# Altium PCB PCB_V12.PcbDoc
Units mm, origin at the board's own origin, x right, y up, seen from the top; angles counter-clockwise.
Board outline 65 x 56 mm, 2 copper layers (Top Layer, Bottom Layer); 64 components, 46 nets, 286 pads, 184 vias.
Unrouted connection lines stored in the file: 18.
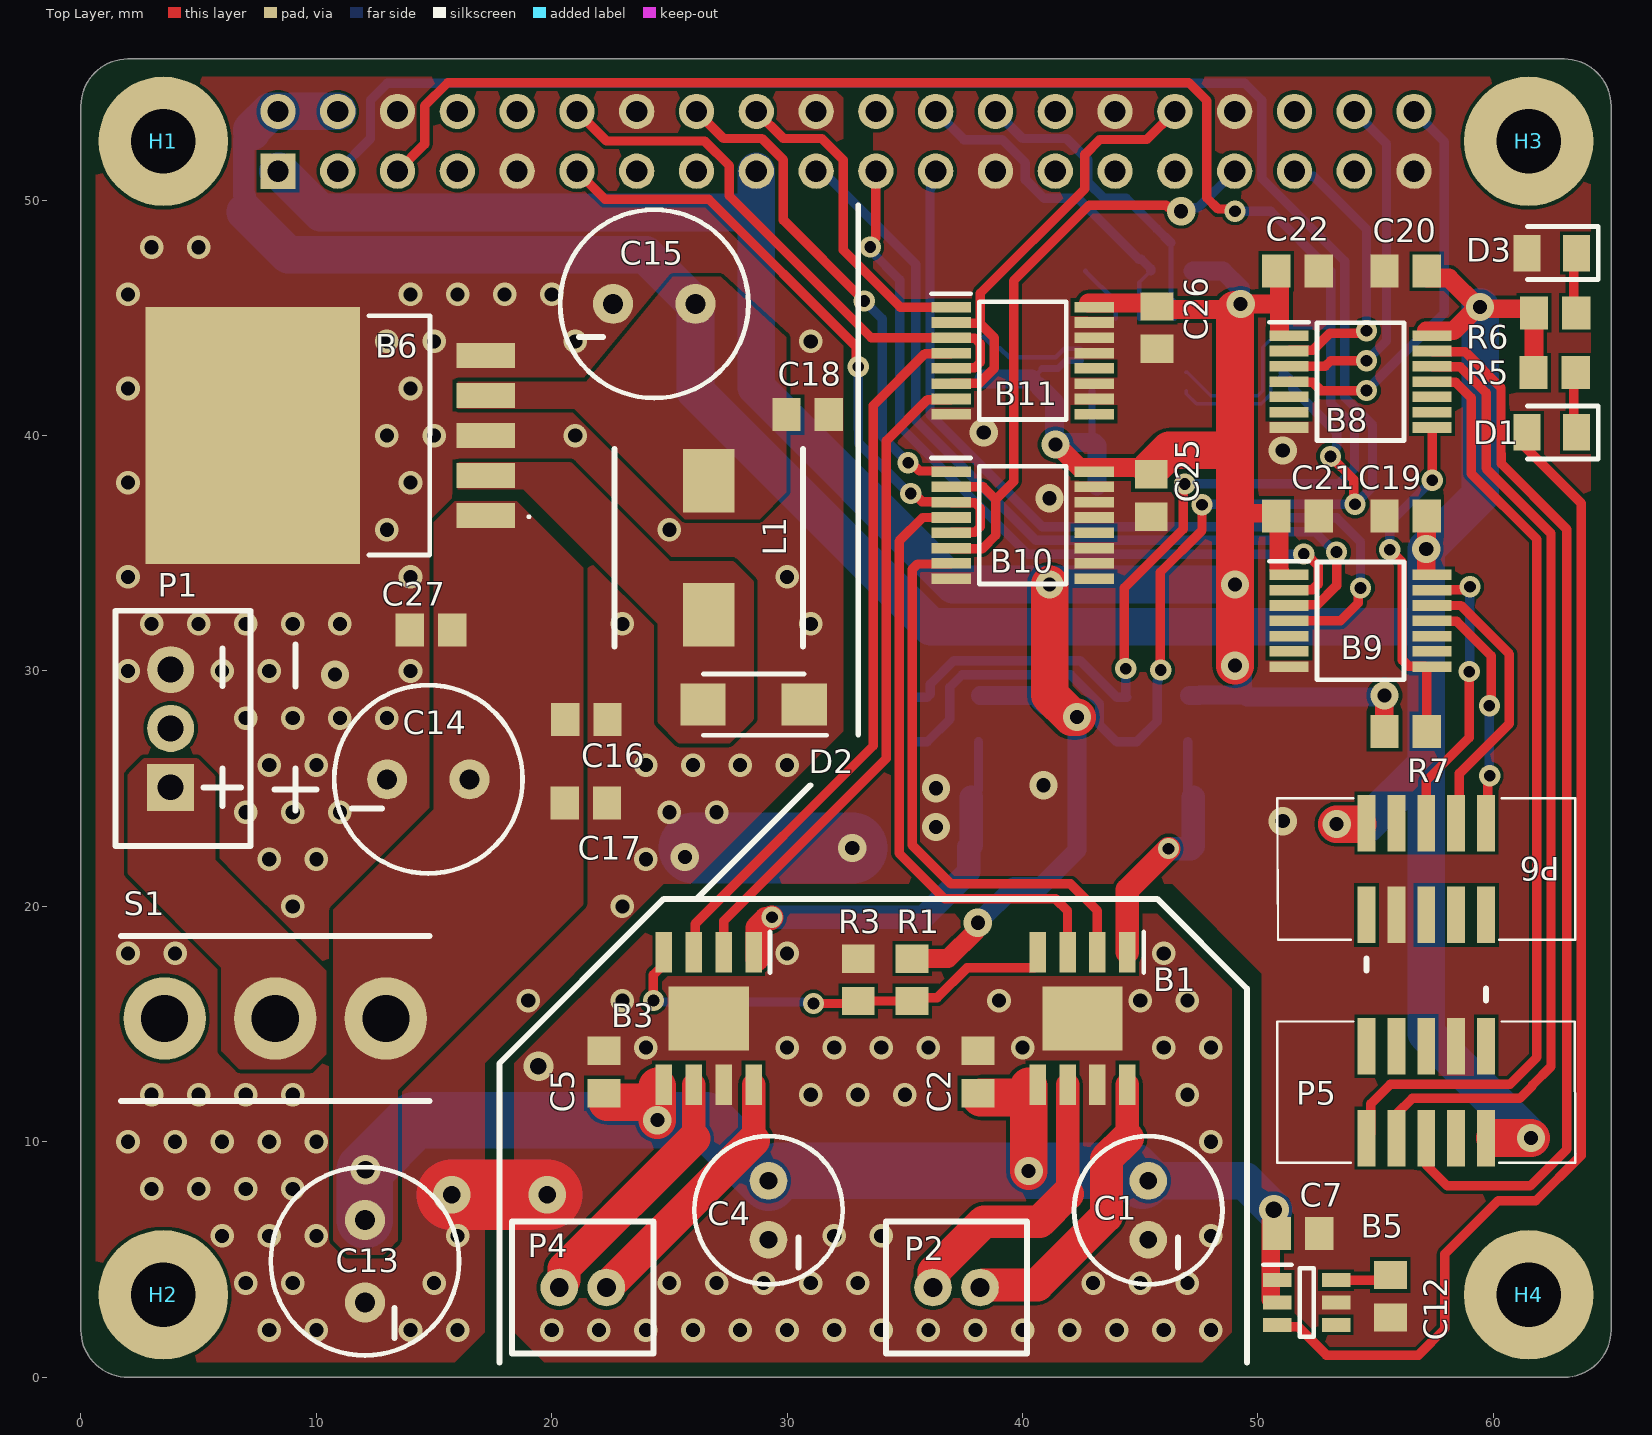
[diagram p0: Top Layer view]
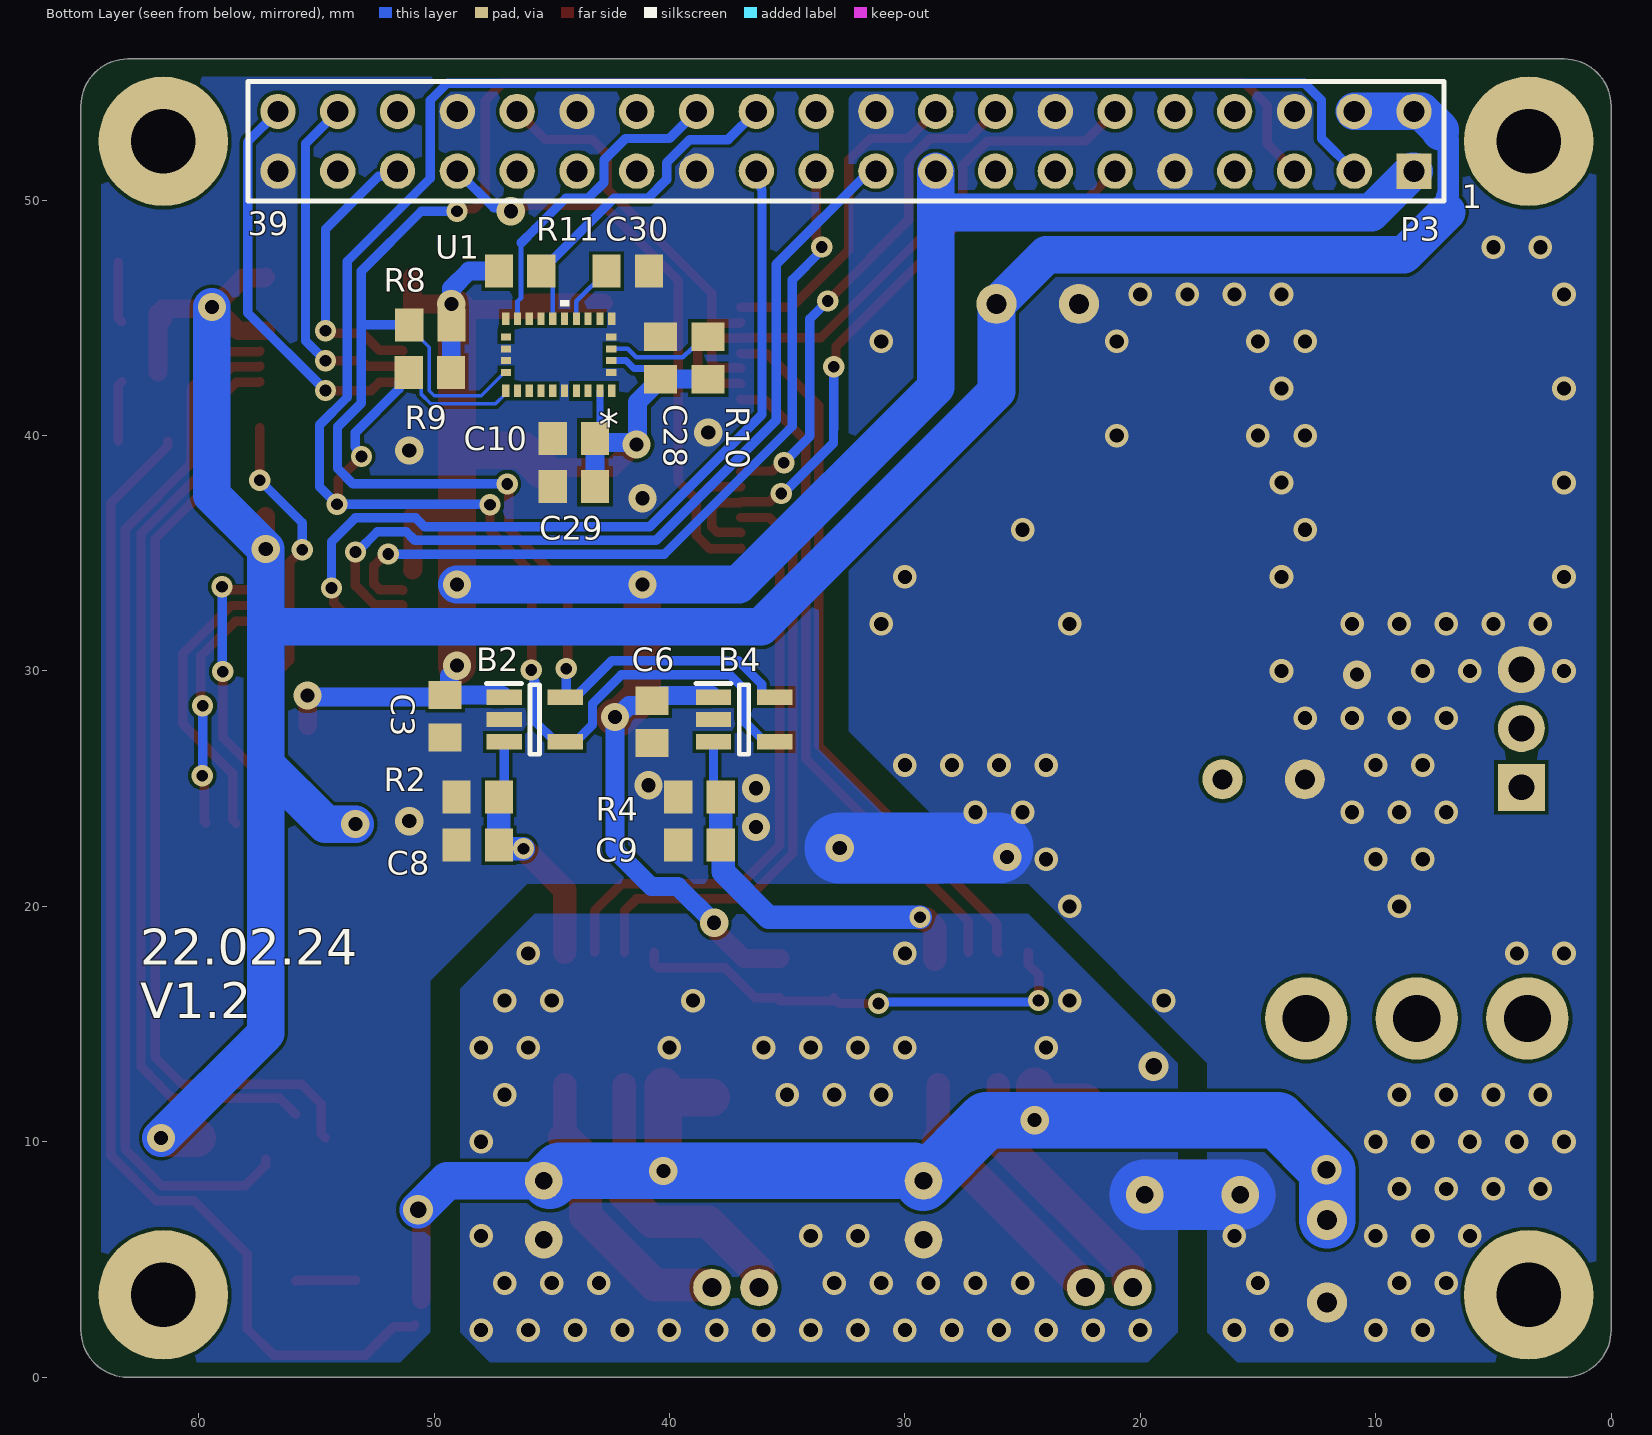
[diagram p1: Bottom Layer view, seen from below]

## Layer stack, top to bottom
Top Solder: solder mask 0.0102, Solder Resist, Dk 3.5
Top Layer: signal copper 0.0356
Dielectric 1: dielectric 0.32, FR-4, Dk 4.8
Bottom Layer: signal copper 0.0356
Bottom Solder: solder mask 0.0102, Solder Resist, Dk 3.5

## Board outline
2,0 cw(c2,2) 0,2 0,54 cw(c2,54) 2,56 63,56 cw(c63,54) 65,54 65,2 cw(c63,2) 63,0

## Design rules (kind name [scope] priority, off if disabled: settings)
BoardOutlineClearance [All] p1: gap=0.254 ignorepadtopadclearanceinfootprint=FALSE except(0: Arc-SplitContinuation Track-SplitContinuation SMDPad-SplitContinuation THPad-SplitContinuation Via-SplitContinuation Fill-SplitContinuation Poly-SplitContinuation Region-SplitContinuation Text-SplitContinuation)
Clearance [All] p1: gap=0.15 ignorepadtopadclearanceinfootprint=FALSE
HoleSize [All] p1: absolutevalues=TRUE maxlimit=3 minlimit=0.45 maxpercent=80.000 minpercent=20.000
PlaneClearance [All] p1: clearance=0.5
PlaneConnect [All] p1: planeconnectstyle=Relief reliefexpansion=0.5 reliefentries=4 reliefconductorwidth=0.3 reliefairgap=0.3
PolygonConnect [All] p1: connectstyle=Direct reliefconductorwidth=0.8 reliefentries=4 polygonreliefangle="90 Angle" airgapwidth=0.2
RoutingVias RoutingVias_1 [(InNet('3V3') OR InNet('5V') OR InNet('Vbat') OR InNet('GND'))] p1: holewidth=0.6 width=1.2 viastyle="Through Hole" minholewidth=0.6 minwidth=1 maxholewidth=0.8 maxwidth=1.6
RoutingVias [All] p2: holewidth=0.5 width=0.9 viastyle="Through Hole" minholewidth=0.5 minwidth=0.9 maxholewidth=0.8 maxwidth=1.6
SMDNeckDown [All] p1: percent=400.000
SilkToSilkClearance [All] p1: silktosilkclearance=0.15
SilkToSolderMaskClearance [IsPad] p1: minsilkscreentomaskgap=0.15 clearancetoexposedcopper=TRUE
SolderMaskExpansion [All] p1: expansion=0.1 istentingtop=FALSE
UnRoutedNet [All] p1: checkbadconnections=TRUE
Width Width_1 [(InNet('3V3') OR InNet('5V') OR InNet('Vbat') OR InNet('GND') OR InNet(NetB3_8) OR InNet('NetB3_6') OR InNet('NetB1_6') OR InNet('NetB1_8'))] p1: maxlimit=3 minlimit=0.2 preferedwidth=0.8 minimp=50.000000 maximp=50.000000 favimp=50.000000
Width [All] p2: maxlimit=1 minlimit=0.15 preferedwidth=0.4
24 further rules are at their usual default settings.

## Classes and differential pairs
component class U_newIMU: C10 C28 C29 C30 R10 R11 U1
component class U_Multiplexer: B10 B11 C25 C26
component class U_PowerSupply: B5 B6 C7 C12 C13 C14 C15 C16 C17 C18 C27 D1 D2 D3 L1 R5 R6
component class U_MotorDrivers: B1 B2 B3 B4 C1 C2 C3 C4 C5 C6 C8 C9 R1 R2 R3 R4
component class U_Encoder: B8 B9 C19 C20 C21 C22 R7
component class Schema: H1 H2 H3 H4 P1 P2 P3 P4 P5 P6 R8 R9 S1

## Components (designator, comment, footprint, x,y, rotation, side; value= is the part's Value field where it differs from the comment)
B1 "DRV8231ADDAR" SOIC127P600X170-9M 42.545,15.24 r270 top locked
B2 "MCP3021A3T-E_OT" SOT95P280X145-5M 45.72,27.94 r180 bottom locked
B3 "DRV8231ADDAR" SOIC127P600X170-9M 26.67,15.24 r270 top locked
B4 "MCP3021A3T-E_OT" SOT95P280X145-5M 36.83,27.94 r180 bottom locked
B5 "S-1011A70-M6T1U4" SOT95P275X135-6N 52.07,3.175 r0 top locked
B6 "AP1501-50K5G-13" AP150150K5G13 11.43,40.005 r90 top locked
B8 "LSF0204PW-Q100J" SOP65P640X110-14M 54.356,42.291 r0 top locked
B9 "LSF0204PW-Q100J" SOP65P640X110-14M 54.356,32.131 r0 top locked
B10 "74LCX157FT" SOP65P640X120-16M 40.005,36.195 r0 top locked
B11 "74LCX157FT" SOP65P640X120-16M 40.005,43.18 r0 top locked
C1 "Cap Pol2" CAP68uF 45.339,8.342 r270 top value=68uF
C2 "Cap" 0805_Lorin 38.1,12.065 r90 top locked value=100nF
C3 "Cap" 0805_Lorin 49.53,27.178 r90 bottom value=100nF
C4 "Cap Pol2" CAP68uF 29.21,8.342 r270 top value=68uF
C5 "Cap" 0805_Lorin 22.225,12.065 r90 top locked value=100nF
C6 "Cap" 0805_Lorin 40.74,26.94 r90 bottom value=100nF
C7 "Cap" 0805_Lorin 52.6,6.096 r180 top value=100nF
C8 "Cap" 0805_Lorin 49.044,22.606 r180 bottom value=~2.2uF
C9 "Cap" 0805_Lorin 39.624,22.606 r180 bottom value=~2.2uF
C10 "Cap" 0805_Lorin 44.958,39.878 r180 bottom value=100nF
C12 "Cap" 0805_Lorin 55.626,2.54 r90 top value="40 - 80 nF"
C13 "Cap Pol2" CAP390uF 12.065,6.675 r270 top value=~390uF
C14 "Cap Pol2" CAP390uF 16.51,25.4 r180 top locked value=~390uF
C15 "Cap Pol2" CAP220uF 26.106,45.593 r180 top locked value=220uF
C16 "Cap" 0805_Lorin 22.374,27.94 r180 top locked value=22uF
C17 "Cap" 0805_Lorin 22.352,24.384 r180 top locked value=22uF
C18 "Cap" 0805_Lorin 31.772,40.894 r180 top value=100nF
C19 "Cap" 0805_Lorin 55.372,36.576 r0 top value=100nF
C20 "Cap" 0805_Lorin 55.372,46.99 r0 top value=100nF
C21 "Cap" 0805_Lorin 52.578,36.576 r180 top value=100nF
C22 "Cap" 0805_Lorin 52.578,46.99 r180 top value=100nF
C25 "Cap" 0805_Lorin 45.466,38.354 r270 top value=100nF
C26 "Cap" 0805_Lorin 45.72,45.488 r270 top value=100nF
C27 "Cap" 0805_Lorin 13.97,31.75 r0 top locked value=22uF
C28 "Cap" 0805_Lorin 40.386,44.196 r270 bottom value=100nF
C29 "Cap" 0805_Lorin 44.958,37.846 r180 bottom value=100nF
C30 "Cap" 0805_Lorin 40.872,46.99 r0 bottom value=1uF
D1 "red LED 1V8" LEDC2012X75M 62.484,40.132 r180 top locked
D2 "B340A" SODFL5226X110M 28.575,28.575 r180 top locked
D3 "green LED 2V65" LEDC2012X75M 62.484,47.752 r180 top locked
H1 "MountingHole" MountingHole#1 43,5 r0 top locked
H2 "MountingHole" MountingHole#2 35,36 r0 top locked
H3 "MountingHole" MountingHole#3 66,33 r0 top locked
H4 "MountingHole" MountingHole#4 61.5,3.5 r0 top locked
L1 "Inductor" Inductor 26.67,32.385 r90 top locked value=47uH
P1 "BatteryConnector" BatteryConnector 3.81,25.059 r90 top locked
P2 "Motor1" MotorConnector 36.195,3.81 r0 top locked
P3 "RaspiConnector" HDR2X20 8.37,51.23 r0 bottom locked
P4 "Motor2" MotorConnector 20.32,3.81 r0 top locked
P5 "Encoder1" EncoderConnector 57.15,12.11 r180 top locked
P6 "Encoder2" EncoderConnector 57.15,21.59 r0 top locked
R1 "Res2" 0805_Lorin 35.306,15.98 r90 top value=390
R2 "Res2" 0805_Lorin 49.044,24.638 r180 bottom value=680
R3 "Res2" 0805_Lorin 33.02,17.78 r270 top value=5K
R4 "Res2" 0805_Lorin 39.624,24.638 r180 bottom value=680
R5 "Res2" 0805_Lorin 63.5,42.672 r180 top value=620
R6 "Res2" 0805_Lorin 63.522,45.212 r180 top value=750
R7 "Res2" 0805_Lorin 57.172,27.432 r180 top value=10K
R8 "Res2" 0805_Lorin 51.054,44.704 r180 bottom value=2K
R9 "Res2" 0805_Lorin 51.076,42.672 r180 bottom value=2K
R10 "Res2" 0805_Lorin 38.354,44.196 r270 bottom value=10K
R11 "Res2" 0805_Lorin 45.444,46.99 r0 bottom value=10K
S1 "Switch" Switch 3.555,15.24 r0 top locked
U1 "BNO055" QFN_BNO055_BOS 44.704,43.434 r0 bottom

## Footprints (in the part's own frame and the unit in brackets; to place one, negate y for a bottom-side part, rotate by r counter-clockwise, add the part's x,y. Pads: shape width x height; smd on the part's side, far side on the other; paste and mask are expansions set on the pad)
0805_Lorin [mm]
  rect 1.2x1.4 smd: 1(0,0) 2(1.8,0)
AP150150K5G13 [mm]
  rect 1.05x2.5 smd: 1(-3.4,-5.765) 2(-1.7,-5.765) 3(0,-5.765) 4(1.7,-5.765) 5(3.4,-5.765)
  rect 10.9x9.1 smd: 6(0,4.135)
  silkscreen extent -5.08,-7.65 5.08,-0.8
BatteryConnector [mm]
  rect 2x2 hole 1.1: 1(0,0)
  round 2 hole 1.1: 2(2.5,0) 3(5,0)
  silkscreen extent -2.5,-3.4 7.5,2.35
CAP68uF [mm]
  round 1.6 hole 0.75: 1(0,0) 2(2.5,0)
  silkscreen extent -1.9,-3.15 4.4,3.15
CAP220uF [mm]
  round 1.7 hole 0.85: 1(0,0) 2(3.5,0)
  silkscreen extent -2.25,-4 5.75,4
CAP390uF [mm]
  round 1.7 hole 0.85: 1(0,0) 2(3.5,0)
  silkscreen extent -2.25,-4 5.75,4
EncoderConnector [mm]
  rect 0.76x2.4 smd: 1(-2.54,-1.95) 2(-2.54,1.95) 3(-1.27,-1.95) 4(-1.27,1.95) 5(0,-1.95) 6(0,1.95) 7(1.27,-1.95) 8(1.27,1.95) 9(2.54,-1.95) 10(2.54,1.95)
  silkscreen extent -6.33,-3 6.33,3
HDR2X20 [mm] "Connector; Header; 20x2 Position"
  rect 1.5x1.5 hole 0.9: 1(0,0)
  round 1.5 hole 0.9: 2(0,-2.54) 3(2.54,0) 4(2.54,-2.54) 5(5.08,0) 6(5.08,-2.54) 7(7.62,0) 8(7.62,-2.54) 9(10.16,0) 10(10.16,-2.54) 11(12.7,0) 12(12.7,-2.54) 13(15.24,0) 14(15.24,-2.54) 15(17.78,0) 16(17.78,-2.54) 17(20.32,0) 18(20.32,-2.54) 19(22.86,0) 20(22.86,-2.54) 21(25.4,0) 22(25.4,-2.54) 23(27.94,0) 24(27.94,-2.54) 25(30.48,0) 26(30.48,-2.54) 27(33.02,0) 28(33.02,-2.54) 29(35.56,0) 30(35.56,-2.54) 31(38.1,0) 32(38.1,-2.54) 33(40.64,0) 34(40.64,-2.54) 35(43.18,0) 36(43.18,-2.54) 37(45.72,0) 38(45.72,-2.54) 39(48.26,0) 40(48.26,-2.54)
  silkscreen extent -1.27,-3.81 49.53,1.27
Inductor [mm]
  rect 2.7x2.2 smd: 1(0,0) 2(5.7,0)
  silkscreen extent -1.35,-4 7.05,4
LEDC2012X75M [mm]
  rect 1.15x1.55 smd: 1(-1.05,0) 2(1.05,0)
  silkscreen extent -1.98,-1.13 1.05,1.13
MotorConnector [mm]
  round 1.6 hole 0.8: 1(0,0) 2(2,0)
  silkscreen extent -2,-2.8 4,2.8
MountingHole#1 [mm]
  round 5.5 hole 2.75: 0(-39.5,47.5)
MountingHole#2 [mm]
  round 5.5 hole 2.75: 0(-31.5,-32.5)
MountingHole#3 [mm]
  round 5.5 hole 2.75: 0(-4.5,19.5)
MountingHole#4 [mm]
  round 5.5 hole 2.75: 0(0,0)
QFN_BNO055_BOS [mil]
  rect 12x21 smd paste+0 mask+0: 1(-88.58,60.5) 6(-88.58,-60.5) 7(-68.9,-60.5) 8(-49.21,-60.5) 9(-29.53,-60.5) 10(-9.84,-60.5) 11(9.84,-60.5) 12(29.53,-60.5) 13(49.21,-60.5) 14(68.9,-60.5) 15(88.58,-60.5) 20(88.58,60.5) 21(68.9,60.5) 22(49.21,60.5) 23(29.53,60.5) 24(9.84,60.5) 25(-9.84,60.5) 26(-29.53,60.5) 27(-49.21,60.5) 28(-68.9,60.5)
  rect 17x12 smd paste+0 mask+0: 2(-88,29.53) 3(-88,9.84) 4(-88,-9.84) 5(-88,-29.53) 16(88,-29.53) 17(88,-9.84) 18(88,9.84) 19(88,29.53)
  silkscreen extent -17,-91 -2,-81
SODFL5226X110M [mm]
  rect 1.92x1.77 smd: 1(-2.15,0) 2(2.15,0)
  silkscreen extent -3.11,-1.3 2.14,1.3
SOIC127P600X170-9M [mm]
  rect 1.725x0.7 smd: 1(-2.812,1.905) 2(-2.812,0.635) 3(-2.812,-0.635) 4(-2.812,-1.905) 5(2.812,-1.905) 6(2.812,-0.635) 7(2.812,0.635) 8(2.812,1.905)
  rect 2.71x3.4 smd: 9(0,0)
  silkscreen extent -3.68,2.61 -1.95,2.61
SOP65P640X110-14M [mm]
  rect 1.675x0.45 smd: 1(-3.038,1.95) 2(-3.038,1.3) 3(-3.038,0.65) 4(-3.038,0) 5(-3.038,-0.65) 6(-3.038,-1.3) 7(-3.038,-1.95) 8(3.038,-1.95) 9(3.038,-1.3) 10(3.038,-0.65) 11(3.038,0) 12(3.038,0.65) 13(3.038,1.3) 14(3.038,1.95)
  silkscreen extent -3.88,-2.5 1.85,2.53
SOP65P640X120-16M [mm]
  rect 1.675x0.45 smd: 1(-3.038,2.275) 2(-3.038,1.625) 3(-3.038,0.975) 4(-3.038,0.325) 5(-3.038,-0.325) 6(-3.038,-0.975) 7(-3.038,-1.625) 8(-3.038,-2.275) 9(3.038,-2.275) 10(3.038,-1.625) 11(3.038,-0.975) 12(3.038,-0.325) 13(3.038,0.325) 14(3.038,0.975) 15(3.038,1.625) 16(3.038,2.275)
  silkscreen extent -3.88,-2.5 1.85,2.85
SOT95P275X135-6N [mm]
  rect 1.2x0.6 smd: 1(-1.25,0.95) 2(-1.25,0) 3(-1.25,-0.95) 4(1.25,-0.95) 5(1.25,0) 6(1.25,0.95)
  silkscreen extent -1.85,-1.45 0.3,1.6
SOT95P280X145-5M [mm]
  rect 1.5x0.65 smd: 1(-1.3,0.95) 2(-1.3,0) 3(-1.3,-0.95) 4(1.3,-0.95) 5(1.3,0.95)
  silkscreen extent -2.05,-1.47 0.2,1.53
Switch [mm]
  round 3.5 hole 2: 1(0,0) 2(4.7,0) 3(9.4,0)
  silkscreen extent -1.85,-3.5 11.25,3.5

## Part data
B1 B3: "Motor Drives 33V H bridge motor driver with current regulation and current sense feedback", Manufacturer_Name="Texas Instruments", Mouser Part Number=595-DRV8231ADDAR, Datasheet Link=https://www.ti.com/lit/ds/symlink/drv8231a.pdf?ts=1647897918552&ref_url=https%253A%252F%252Fwww.ti.com%252Fstore%252Fti%252Fen%252Fp%252Fproduct%252F%253Fp%253DDRV8231ADDAR%2526keyMatch%253DDRV8231ADDAR%2526tisearch%253Dsearch-everything%2526usecase%253DO, Geometry.Height=1.7mm, Manufacturer_Part_Number=DRV8231ADDAR, Mouser Price/Stock=https://www.mouser.co.uk/ProductDetail/Texas-Instruments/DRV8231ADDAR?qs=Li%252BoUPsLEnsv4Ur6m37LNQ%3D%3D
B2 B4: "Analog to Digital Converters - ADC 10-bit ADC I2C Single Channel", Manufacturer_Name=Microchip, Manufacturer_Part_Number=MCP3021A3T-E/OT, Mouser Part Number=579-MCP3021A3T-E/OT, Datasheet Link=http://www.microchip.com/mymicrochip/filehandler.aspx?ddocname=en011709, Geometry.Height=1.45mm, Mouser Price/Stock=https://www.mouser.co.uk/ProductDetail/Microchip-Technology/MCP3021A3T-E-OT?qs=uHi2%2FQoPa5Cra0xx31l%252Buw%3D%3D
B5: "Supervisory Circuits VOLTAGE DETECTOR", Manufacturer_Name="ABLIC Inc.", Mouser Part Number=628-S-1011A70-M6T1U4, Datasheet Link=https://www.digikey.co.uk/en/products/detail/ablic-u-s-a-inc/S-1011A70-M6T1U4/6601814, Geometry.Height=1.35mm, Manufacturer_Part_Number=S-1011A70-M6T1U4, Mouser Price/Stock=https://www.mouser.co.uk/ProductDetail/ABLIC/S-1011A70-M6T1U4?qs=sE1HjTVAc2hYS3q6FFCWDQ%3D%3D
B6: "IC REG BUCK 5V 3A TO263-5", Manufacturer_Name="Diodes Inc.", Mouser Part Number=621-AP1501-50K5G-13, Datasheet Link=https://www.diodes.com/assets/Datasheets/AP1501.pdf, Geometry.Height=4.85mm, Manufacturer_Part_Number=AP1501-50K5G-13, Mouser Price/Stock=https://www.mouser.co.uk/ProductDetail/Diodes-Incorporated/AP1501-50K5G-13?qs=oUsD4qhOtFyyLLjAHWqfUw%3D%3D
B8 B9: "Translation - Voltage Levels ANALOG & LOGIC ICS", Manufacturer_Name=Nexperia, Mouser Part Number=771-LSF0204PW-Q100J, Datasheet Link=https://assets.nexperia.com/documents/data-sheet/LSF0204_Q100.pdf, Geometry.Height=1.1mm, Manufacturer_Part_Number=LSF0204PW-Q100J, Mouser Price/Stock=https://www.mouser.co.uk/ProductDetail/Nexperia/LSF0204PW-Q100J?qs=DPoM0jnrROXA8naUdxkzeA%3D%3D
B10 B11: "74LCX157FT Toshiba, Multiplexer Quad, -0.5  6.5 V, 16-Pin TSSOP", Manufacturer_Name=Toshiba, Mouser Part Number=757-74LCX157FT, Datasheet Link=https://toshiba.semicon-storage.com/eu/semiconductor/product/general-purpose-logic-ics/detail.74LCX157FT.html, Geometry.Height=1.2mm, Manufacturer_Part_Number=74LCX157FT, Mouser Price/Stock=https://www.mouser.co.uk/ProductDetail/Toshiba/74LCX157FT?qs=F5EMLAvA7IBvOqmQf3om6A%3D%3D
C1 C4 C13 C14 C15: "Polarized Capacitor (Axial)", LatestRevisionDate=17-Jul-2002, LatestRevisionNote="Re-released for DXP Platform.", PackageDescription="Polarized Capacitor; 2 Leads", PackageReference=POLAR0.8, Published=8-Jun-2000, Publisher="Altium Limited"
C2 C3 C5 C6 C7 C8 C9 C10 C12 C16 C17 C18 C19 C20 C21 C22 C25 C26 C27 C28 C29 C30: "Capacitor", LatestRevisionDate=17-Jul-2002, LatestRevisionNote="Re-released for DXP Platform.", PackageDescription="Radial Cap, Thru-Hole; 2 Leads; 0.3 in Pin Spacing", PackageReference=RAD-0.3, Published=8-Jun-2000, Publisher="Altium Limited"
D1 D3: library part LED0, "Typical INFRARED GaAs LED", LatestRevisionDate=08-Jul-2005, LatestRevisionNote="Mech Layer 1 removed.", PackageDescription="LED; 2 Leads", PackageReference=LED-0, Published=8-Jun-2000, Publisher="Altium Limited"
D2: library part "D Schottky", "Schottky Diode", Code_JEDEC=DO-214-AA, LatestRevisionDate=17-Jul-2002, LatestRevisionNote="Re-released for DXP Platform.", PackageDescription="DO-214-AA/SMB; 2 C-Bend Leads; Body 5.3 x 3.6 mm, inc. leads (LxW)", PackageReference=SMB, Published=8-Jun-2000, Publisher="Altium Limited"
P1: library part "Header 3", "Header, 3-Pin", LatestRevisionDate=17-Jul-2002, LatestRevisionNote="Re-released for DXP Platform.", Publisher="Altium Limited"
P2 P4: library part "Header 2", "Header, 2-Pin", LatestRevisionDate=17-Jul-2002, LatestRevisionNote="Re-released for DXP Platform.", Publisher="Altium Limited"
P3: library part "Header 20X2", "Header, 20-Pin, Dual row", LatestRevisionDate=17-Jul-2002, LatestRevisionNote="Re-released for DXP Platform.", Publisher="Altium Limited"
P5 P6: library part "Header 10", "Header, 10-Pin", LatestRevisionDate=17-Jul-2002, LatestRevisionNote="Re-released for DXP Platform.", Publisher="Altium Limited"
R1 R2 R3 R4 R5 R6 R7 R8 R9 R10 R11: "Resistor", LatestRevisionDate=17-Jul-2002, LatestRevisionNote="Re-released for DXP Platform.", PackageDescription="Axial Device, Thru-Hole; 2 Leads; 0.4 in Pin Spacing", PackageReference=AXIAL-0.4, Published=8-Jun-2000, Publisher="Altium Limited"
U1: "No Description Available", Mfr_Name="Bosch Sensortec", Copyright="Copyright (C) 2024 Ultra Librarian. All rights reserved.", Manufacturer_Part_Number=BNO055, RefDes=RefDes, Type=DEV
L1: Code_IEC=1005, Code_JEITA=0402, LatestRevisionDate=29-May-2009, LatestRevisionNote="IPC-7351 Footprint Added.", PackageDescription="Chip Inductor", PackageReference=0402-A, Published=8-Jun-2000, Publisher="Altium Limited"

## Via types
v1: diameter 1, hole 0.6, Top Layer to Bottom Layer, 126 vias
v2: diameter 0.9, hole 0.5, Top Layer to Bottom Layer, 28 vias
v3: diameter 1.2, hole 0.6, Top Layer to Bottom Layer, 25 vias
v4: diameter 1.27, hole 0.711, Top Layer to Bottom Layer, 2 vias
v5: diameter 1.6, hole 0.75, Top Layer to Bottom Layer, 2 vias
v6: diameter 1.27, hole 0.75, Top Layer to Bottom Layer, 1 vias

## Nets (pads, with @x,y where several pads share a name; then routed paths per layer and width w, separated by ;. In a path a pad name is that pad's centre, name@x,y a point inside that pad or via, vN(x,y) a via of type N, cw(c..) or ccw(c..) an arc to the next point about the centre after c; other vN are vias at no path point)
3V3: B2.1 B4.1 B8.1 B9.1 B10.16 B11.16 C3.2 C6.2 C10.2 C21.2 C22.2 C25.1 C26.1 C28.2 C29.2 P3.1 P3.17 R1.2 R7.2 R8.2 R9.2 R10.2 R11.2 U1.3 U1.28 | length 146.2
  Top Layer w0.8: R1.2 36.83,17.78 38.023,18.973 38.023,19.227 v3(38.1,19.304) ; v3(41.402,39.624) 41.439,39.624 42.418,38.645 C25.1@44.897,38.645 ; B11.16@42.799,45.63 C26.1@45.974,45.63 ; C26.1@45.72,45.35 49.022,45.35 v3(49.265,45.593) 50.774,45.593 ; 49.149,36.703 50.789,36.703 50.916,36.576 50.893,36.553 50.893,34.313 B9.1@50.916,34.29 ; B8.1@50.916,44.425 C22.2@50.916,46.736 ; R7.2@55.361,27.686 55.366,27.692 55.366,28.95 v3(55.372,28.956)
  Top Layer w1.6: v3(41.148,33.677) 41.148,28.979 42.085,28.042 v3(42.316,28.042) ; C25.1@45.466,38.565 45.466,38.602 46.234,39.37 49.022,39.37 ; v3(49.022,30.226) v3(49.022,33.677) 49.022,39.37 ; v3@49.022,45.35 49.022,39.37
  Bottom Layer w0.2: C28.2 C28.2@40.836,42.846 ; C10.2@42.954,39.782 C10.2@43.035,39.701
  Bottom Layer w0.3: C28.2@40.836,42.846 41.504,42.846 41.842,43.184 U1.3 ; C10.2@42.954,39.782 U1.28
  Bottom Layer w0.8: v3(38.1,19.304) 39.638,20.842 40.762,20.842 42.316,22.396 v3(42.316,28.042) 42.208,28.042 41.71,28.54 40.94,28.54 C6.2 C6.2@40.64,28.84 ; B4.1@38.205,28.965 C6.2@40.319,28.965 ; R10.2 C28.2 ; C28.2@40.686,42.096 41.358,41.424 41.358,39.668 v3(41.402,39.624) 41.479,39.701 43.035,39.701 43.158,39.578 C29.2 ; B2.1@47.095,28.965 47.52,28.965 47.533,28.978 C3.2@49.276,28.978 ; R11.2 48.514,46.99 49.254,46.25 R8.2 49.265,44.693 49.265,42.683 R9.2 ; v3(49.022,30.226) 49.022,30.118 49.353,29.787 49.353,29.271 C3.2@49.366,29.258 ; C3.2@49.53,28.898 55.314,28.898 v3(55.372,28.956)
  Bottom Layer w1.6: P3.1 8.435,51.23 10.19,49.475 28.69,49.475 ; P3.17 28.69,49.475 ; v3(49.022,33.677) v3(41.148,33.677) 37.062,33.677 28.69,42.049 28.69,49.475
5V: B6.4 B8.14 B9.14 C15.1 C18.2 C19.2 C20.2 L1.2 P3.2 P3.4 P5.2 P6.2 R5.2 R6.2 | length 125.5
  Top Layer w0.8: B9.14@57.15,34.29 v3(57.15,35.179) 57.156,35.185 57.156,36.57 C19.2@57.161,36.576 ; B8.14@57.15,44.45 58.312,44.45 59.328,45.466 v3(59.436,45.466) ; C20.2@57.161,46.736 57.207,46.69 58.114,46.69 59.338,45.466 v3(59.436,45.466) ; R6.2@61.522,44.931 61.522,45.389 59.513,45.389 v3(59.436,45.466) ; R5.2@61.722,42.694 R6.2
  Top Layer w1.6: v3(53.343,23.495) 54.229,23.495 ; 60.071,10.16 v3(61.595,10.16)
  Bottom Layer w0.9: 6.985,49.499 6.985,50.165 6.92,50.23 6.92,52.579 7.25,52.909
  Bottom Layer w1.6: 6.985,49.499 8.809,47.675 23.997,47.675 C15.1@26.079,45.593 ; 7.25,52.909 7.25,52.98 8.04,53.77 P3.2 P3.4 ; C15.1 26.106,41.883 36.112,31.877 57.15,31.877 ; v3(53.343,23.495) 54.61,23.495 57.15,26.035 ; v3(59.436,45.466) 59.436,37.465 v3(57.15,35.179) 57.15,31.877 ; v3(61.595,10.16) 57.15,14.605 57.15,26.035 ; 57.15,26.035 57.15,31.877
GND: B1.7 B1.9 B2.2 B3.7 B3.9 B4.2 B5.5 B6.3 B6.5 B6.6 B8.7 B9.7 B10.8 B10.10 B10.11 B10.13 B10.14 B10.15 B11.8 B11.10 B11.11 B11.13 B11.14 B11.15 C1.2 C2.2 C3.1 C4.2 C5.2 C6.1 C7.1 C8.1 C9.1 C10.1 C12.1 C13.2 C14.2 C15.2 C16.1 C17.1 C18.1 C19.1 C20.1 C21.1 C22.1 C25.2 C26.2 C27.1 C28.1 C29.1 C30.1 D2.1 D3.2 P1.3 P3.6 P3.9 P3.14 P3.20 P3.25 P3.30 P3.34 P3.39 P5.3 P6.3 R2.1 R3.1 R4.1 U1.2 U1.5 U1.6 U1.17 U1.18 U1.25 | length 14.9
  Top Layer w3: v5(15.748,7.747) v5(19.812,7.747)
  Bottom Layer w3: v5(15.748,7.747) v5(19.812,7.747) ; v3@26.035,22.479 v3(32.766,22.479)
  other v1: 8,2 10,2 14,2 16,2 20,2 22,2 24,2 26,2 28,2 30,2 32,2 34,2 36,2 38,2 40,2 42,2 44,2 46,2 48,2 7,4 9,4 15,4 25,4 27,4 29,4 31,4 33,4 43,4 45,4 47,4 6,6 8,6 10,6 16,6 32,6 34,6 48,6 3,8 5,8 7,8 9,8 2,10 4,10 6,10 8,10 10,10 48,10 3,12 5,12 7,12 9,12 31,12 33,12 35,12 47,12 24,14 30,14 32,14 34,14 36,14 40,14 46,14 48,14 19,16 23,16 39,16 45,16 47,16 2,18 4,18 30,18 46,18 9,20 23,20 8,22 10,22 24,22 7,24 9,24 11,24 25,24 27,24 8,26 10,26 24,26 26,26 28,26 30,26 7,28 9,28 11,28 13,28 2,30 6,30 8,30 14,30 3,32 5,32 7,32 9,32 11,32 23,32 31,32 2,34 14,34 30,34 13,36 25,36 2,38 14,38 13,40 15,40 21,40 2,42 14,42 13,44 15,44 21,44 31,44 2,46 14,46 16,46 18,46 20,46 3,48 5,48
  other v3: 25.654,22.098 36.322,23.368 51.054,23.622 36.322,25.019 40.894,25.146 10.795,29.845 41.148,37.338 51.054,39.37 38.354,40.132
  other v4: 19.431,13.208
NetB1_1: B1.1 B2.3 C8.2 R2.2 | length 10.7
  Top Layer w1: B1.1 44.45,20.701 v2(46.202,22.453)
  Bottom Layer w0.4: B2.3 47.02,24.862 R2.2
  Bottom Layer w1: v2(46.202,22.453) 47.144,22.453 47.244,22.553 C8.2 R2.2
NetB1_2: B1.2 B10.7 | length 24.3
  Top Layer w0.4: B10.7 36.942,34.545 35.54,34.545 35.306,34.311 35.306,22.606 36.957,20.955 42.037,20.955 43.18,19.812 B1.2
NetB1_3: B1.3 B10.4 | length 25.8
  Top Layer w0.4: B10.4 35.758,36.52 34.756,35.518 34.756,22.258 36.694,20.32 41.402,20.32 41.91,19.812 B1.3
NetB1_4: B1.4 B3.4 R1.1 R3.2 | length 19.8
  Top Layer w0.4: v2(24.32,16.002) 24.32,17.094 24.765,17.539 B3.4 ; v2(31.115,15.875) 32.777,15.875 R3.2@33.02,16.118 ; R3.2 R1.1 ; R1.1@35.306,16.118 36.369,16.118 37.641,17.389 40.49,17.389 40.64,17.539 B1.4
  Bottom Layer w0.4: v2(24.32,16.002) 24.383,15.938 31.051,15.938 v2(31.115,15.875)
NetB1_6: B1.6 P2.1 | length 12.4
  Top Layer w1: 41.91,7.785 B1.6
  Top Layer w1.4: P2.1 36.233,3.848 36.233,4.483 38.354,6.604 40.729,6.604 41.91,7.785
NetB1_8: B1.8 P2.2 | length 12.7
  Top Layer w1: P2.2 P2.2@38.31,3.925 ; 44.45,10.16 B1.8
  Top Layer w1.4: P2.2@38.26,3.875 38.287,3.848 38.364,3.925 40.628,3.925 43.561,6.858 43.561,9.271 44.45,10.16
NetB2_4: B2.4 B4.4 P3.3 R9.1 U1.20 | length 104.4
  Top Layer w0.4: v2(45.87,30.04) 45.847,30.063 45.847,34.197 47.622,35.972 v2(47.622,37.059) ; v2(53.086,39.116) 54.068,38.134 54.068,37.138 v2(54.122,37.084)
  Bottom Layer w0.15: U1.20 46.954,41.783 47.39,41.347 50.135,41.347 50.551,41.763 50.551,42.147 R9.1@51.054,42.65
  Bottom Layer w0.4: P3.3 12.3,52.62 12.3,54.246 13.019,54.966 49.441,54.966 50.16,54.246 50.16,50.932 53.686,47.406 53.686,41.632 54.864,40.454 54.864,37.826 v2(54.122,37.084) 47.647,37.084 v2(47.622,37.059) ; B4.4 35.955,26.99 36.906,27.941 36.906,29.307 37.439,29.84 42.042,29.84 43.27,28.612 43.27,27.715 43.995,26.99 B2.4 44.845,26.99 45.72,27.865 45.72,29.556 45.774,29.61 45.774,29.944 v2(45.87,30.04) ; R9.1 51.476,42.272 51.476,41.996 53.34,40.132 53.34,39.505 53.086,39.251 v2(53.086,39.116)
NetB2_5: B2.5 B4.5 P3.5 R8.1 U1.19 | length 93.7
  Top Layer w0.4: P3.5 14.6,52.38 14.6,54.006 15.585,54.991 47.066,54.991 47.828,54.229 47.828,50.104 48.307,49.626 48.926,49.626 v2(49.022,49.53) ; v2(44.382,30.099) 44.323,30.158 44.323,33.528 46.822,36.027 46.822,37.881 v2(46.888,37.948)
  Bottom Layer w0.15: U1.19 47.003,42.684 47.99,41.697 49.99,41.697 50.201,41.908 50.201,43.751 51.054,44.604 R8.1
  Bottom Layer w0.4: B4.5 35.955,28.89 36.08,29.015 36.08,29.44 37.08,30.44 42.445,30.44 43.995,28.89 B2.5 44.382,28.928 v2(44.382,30.099) ; v2(46.888,37.948) 53.442,37.948 54.102,38.608 54.102,40.367 53.086,41.383 53.086,44.704 ; v2(49.022,49.53) 50.546,49.53 53.086,46.99 53.086,44.704 ; R8.1 53.086,44.704
NetB3_1: B3.1 B4.3 C9.2 R4.2 | length 17
  Top Layer w1: B3.1@28.725,17.755 28.725,19.092 29.099,19.466 29.276,19.466 v2(29.353,19.542)
  Bottom Layer w0.4: R4.2 38.13,24.944 B4.3
  Bottom Layer w1: v2(29.353,19.542) 35.787,19.542 37.724,21.479 37.724,22.506 C9.2 R4.2
NetB3_2: B3.2 B11.7 | length 28.1
  Top Layer w0.4: B3.2 27.305,19.38 34.206,26.281 34.206,39.772 35.964,41.53 36.942,41.53 B11.7
NetB3_3: B3.3 B11.4 | length 30.6
  Top Layer w0.4: B3.3 26.09,18.107 26.09,19.258 33.656,26.823 33.656,41.276 35.86,43.48 36.942,43.48 B11.4
NetB3_6: B3.6 P4.1 | length 11
  Top Layer w1: 26.035,10.135 B3.6
  Top Layer w1.2: P4.1 20.32,3.918 P4.1@20.52,4.118
  Top Layer w1.4: P4.1@20.52,4.118 20.52,4.62 26.035,10.135
NetB3_8: B3.8 P4.2 | length 11.2
  Top Layer w1: 28.575,10.065 B3.8
  Top Layer w1.4: P4.2 28.575,10.065
NetB5_3: B5.3 D1.2 | length 50.1
  Top Layer w0.4: B5.3 50.893,2.152 51.696,2.152 52.908,0.94 56.82,0.94 57.937,2.057 57.937,5.232 60.198,7.493 61.798,7.493 63.725,9.42 63.725,37.133 61.307,39.551 D1.2@61.307,39.751
NetB5_6: B5.6 C12.2 | length 2.6
  Top Layer w0.4: B5.6 55.83,4.125 C12.2@55.88,4.075
NetB6_2: B6.2 D2.2 L1.1
NetB8_2: B8.2 P3.35 | length 12
  Top Layer w0.4: B8.2 51.343,43.616 52.321,43.616 53.06,44.354 54.514,44.354 v2(54.61,44.45)
  Bottom Layer w0.4: P3.35 51.76,51.02 52.358,51.02 54.61,48.768 v2(54.61,44.45)
NetB8_3: B8.3 P3.38 | length 14.9
  Top Layer w0.4: B8.3 52.852,42.941 53.091,43.18 v2(54.61,43.18)
  Bottom Layer w0.4: P3.38 55.46,52.4 55.46,44.03 v2(54.61,43.18)
NetB8_4: B8.4 P3.40 | length 17.2
  Top Layer w0.4: B8.4@51.343,42.316 B8.4 51.343,42.266 52.321,42.266 52.677,41.91 v2(54.61,41.91)
  Bottom Layer w0.4: v2(54.61,41.91) 57.912,45.212 57.912,52.488 P3.40
NetB8_8: B8.8 B9.8 R7.1 | length 14.7
  Top Layer w0.4: v2(55.601,35.154) 56.134,34.62 56.134,30.463 56.391,30.206 57.111,30.206 57.161,30.156 R7.1@57.161,27.686 ; B9.8@57.186,30.181 B9.8 ; B8.8 57.404,40.331 v2(57.404,38.1)
  Bottom Layer w0.4: v2(55.601,35.154) 55.601,36.297 v2(57.404,38.1)
NetB8_11: B8.11 P5.10 | length 40.5
  Top Layer w0.4: P5.10 54.79,10.34 54.79,11.61 55.626,12.446 60.706,12.446 61.849,13.589 61.849,35.596 59.055,38.39 59.055,41.608 58.397,42.266 57.419,42.266 B8.11
NetB8_12: B8.12 P5.8 | length 39.9
  Top Layer w0.4: P5.8@55.88,11.176 56.55,11.846 61.122,11.846 61.65,12.374 61.65,12.399 62.449,13.198 62.449,35.845 59.69,38.604 59.69,41.822 58.596,42.916 57.419,42.916 B8.12
NetB8_13: B8.13 P5.6 | length 44.3
  Top Layer w0.4: P5.6@57.15,9.271 57.15,9.017 58.039,8.128 61.57,8.128 63.125,9.683 63.125,36.017 63.025,36.117 60.332,38.81 60.332,39.236 60.325,39.243 60.325,42.035 58.794,43.566 57.419,43.566 B8.13
NetB9_2: B9.2 P3.21 | length 33.8
  Top Layer w0.4: v2(33.528,48.006) 33.528,48.141 33.77,48.383 P3.21 ; B9.2 51.343,33.456 52.321,33.456 52.556,33.69 52.556,34.472 52.063,34.964 v2(51.943,34.964)
  Bottom Layer w0.4: v2(33.528,48.006) 33.528,47.871 34.787,46.612 34.787,40.397 40.224,34.96 51.939,34.96 v2(51.943,34.964)
NetB9_3: B9.3 P3.19 | length 36.8
  Top Layer w0.4: B9.3 51.343,32.806 52.52,32.806 53.34,33.626 v2(53.34,35.052)
  Bottom Layer w0.4: P3.19 31.506,51.23 35.468,47.268 35.468,40.645 40.553,35.56 50.825,35.56 51.181,35.916 52.409,35.916 53.272,35.052 v2(53.34,35.052)
NetB9_4: B9.4 P3.23 | length 37.2
  Top Layer w0.4: B9.4 53.504,32.131 54.26,32.887 54.26,33.432 v2(54.356,33.528)
  Bottom Layer w0.4: P3.23 36.1,51.02 36.1,50.477 36.068,50.446 36.068,40.894 40.843,36.119 50.394,36.119 50.777,36.502 53.346,36.502 54.356,35.492 v2(54.356,33.528)
NetB9_11: B9.11 P6.10 | length 10.3
  Top Layer w0.4: B9.11 57.419,32.106 58.445,32.106 59.902,30.649 59.902,28.597 v2(59.829,28.524) ; P6.10 59.766,23.616 59.766,25.476 v2(59.842,25.552)
  Bottom Layer w0.4: v2(59.829,28.524) 59.829,25.566 v2(59.842,25.552)
NetB9_12: B9.12 P6.8 | length 12.3
  Top Layer w0.4: B9.12@57.419,32.756 B9.12 58.619,32.781 60.681,30.719 60.681,27.77 58.558,25.648 58.558,23.678 P6.8
NetB9_13: B9.13 P6.6 | length 12.5
  Top Layer w0.4: P6.6 57.15,25.34 58.979,27.169 v2(58.979,29.972) ; B9.13 57.419,33.456 58.746,33.456 58.869,33.579 v2(59.004,33.579)
  Bottom Layer w0.4: v2(58.979,29.972) 58.991,29.985 58.991,33.566 v2(59.004,33.579)
NetB10_1: B10.1 P3.16 | length 21.6
  Top Layer w0.4: P3.16 27.3,52.62 28.926,52.62 29.84,51.706 29.84,49.154 v2(33.274,45.72) ; v2(35.14,38.842) 35.275,38.842 35.622,38.495 36.942,38.495 B10.1
  Bottom Layer w0.4: v2(33.274,45.72) 34.036,44.958 34.036,39.966 35.14,38.862 v2(35.14,38.842)
NetB10_2: B10.2 B10.6 P3.33 | length 26.9
  Top Layer w0.4: B10.6 36.992,35.195 38.295,35.195 38.862,35.762 38.862,37.286 ; B10.2 38.132,37.82 38.328,37.82 38.862,37.286 ; v3(46.736,49.53) 46.583,49.683 46.203,49.683 46.102,49.784 42.824,49.784 39.624,46.584 39.624,38.048 38.862,37.286
  Bottom Layer w0.4: v3(46.736,49.53) 46.889,49.683 47.463,49.683 P3.33
NetB10_3: B10.3 B10.5 P3.11 | length 27.5
  Top Layer w0.4: P3.11 22.262,50.038 26.67,50.038 32.924,43.784 32.924,43.022 v2(33.02,42.926) ; v2(35.252,37.538) 35.387,37.538 35.73,37.195 36.942,37.195 36.992,37.145 37.97,37.145 38.205,36.911 38.205,36.129 37.97,35.895 36.992,35.895 B10.5
  Bottom Layer w0.4: v2(33.02,42.926) 33.02,40.269 33.032,40.256 33.032,39.68 35.174,37.538 v2(35.252,37.538)
NetB11_1: B11.1 P3.18 | length 14
  Top Layer w0.4: P3.18 29.84,52.62 31.466,52.62 32.38,51.706 32.38,47.884 34.809,45.455 B11.1
NetB11_2: B11.2 B11.6 P3.32 | length 19.1
  Top Layer w0.4: B11.6 36.992,42.23 38.169,42.23 38.805,42.866 38.805,44.144 38.169,44.78 36.992,44.78 B11.2 ; 38.205,44.78 38.205,46.042 42.647,50.485 42.647,51.943 43.282,52.578 45.278,52.578 P3.32
NetB11_3: B11.3 B11.5 P3.12 | length 24.1
  Top Layer w0.4: P3.12 22.327,52.513 26.493,52.513 27.54,51.466 27.54,50.184 33.569,44.155 B11.3 36.992,44.13 37.97,44.13 38.205,43.896 38.205,43.114 37.97,42.88 36.992,42.88 B11.5
NetC30_2: C30.2 U1.9 | length 2.6
  Bottom Layer w0.2: C30.2 43.954,45.708 U1.9
NetD1_1: D1.1 R5.1 | length 2.6
  Top Layer w0.4: R5.1@63.257,42.291 63.407,42.141 D1.1@63.407,39.751
NetD3_1: D3.1 R6.1 | length 2.6
  Top Layer w0.4: R6.1@63.257,44.831 63.407,44.981 D3.1@63.407,47.371
NetP1_1: P1.1 S1.2
NetP3_24: P3.24 R11.1 U1.11 | length 14.6
  Bottom Layer w0.15: R11.1@44.954,46.5 R11.1
  Bottom Layer w0.2: U1.11 R11.1@44.954,46.5
  Bottom Layer w0.4: P3.24 37.507,52.573 39.133,52.573 40.12,51.586 40.12,50.874 40.914,50.08 42.354,50.08 44.944,47.49 45.044,47.49 45.444,47.09 R11.1
NetP3_26: P3.26 U1.14 | length 13.6
  Bottom Layer w0.2: 46.304,48.184 46.304,45.847 46.454,45.697 U1.14
  Bottom Layer w0.4: P3.26 40,52.62 41.868,52.62 42.78,51.708 42.78,50.754 43.454,50.08 44.408,50.08 45.704,48.784 46.304,48.184
NetR10_1: R10.1 U1.4 | length 4.6
  Bottom Layer w0.2: R10.1 38.854,43.696 39.057,43.696 39.432,43.321 41.413,43.321 41.776,43.684 U1.4
Vbat: B1.5 B3.5 B5.1 B5.2 B6.1 C1.1 C2.1 C4.1 C5.1 C7.2 C13.1 C14.1 C16.2 C17.2 C27.2 S1.3 | length 55.5
  Top Layer w0.8: B5.2@50.546,3.3 50.546,4.125 50.546,6.096 C7.2@50.546,6.604
  Top Layer w1.6: C5.1@22.352,11.684 24.13,11.684 ; v3(24.486,10.919) B3.5@24.486,12.366 ; C2.1@38.227,11.88 40.259,11.88 ; v3(40.259,8.763) 40.259,12.366
  Bottom Layer w1.6: C1.1 49.443,8.342 v4(50.673,7.112)
  Bottom Layer w2.4: C13.1 12.065,8.814 14.17,10.919 26.546,10.919 C4.1@29.21,8.255 ; C4.1 29.631,8.763 v3(40.259,8.763) 44.664,8.763 C1.1@45.085,8.342
  other v6: 12.09,8.814
pads on no net: B5.4 B8.5 B8.6 B8.9 B8.10 B9.5 B9.6 B9.9 B9.10 B10.9 B10.12 B11.9 B11.12 H1.0 H2.0 H3.0 H4.0 P1.2 P3.7 P3.8 P3.10 P3.13 P3.15 P3.22 P3.27 P3.28 P3.29 P3.31 P3.36 P3.37 P5.1 P5.4 P5.5 P5.7 P5.9 P6.1 P6.4 P6.5 P6.7 P6.9 S1.1 U1.1 U1.7 U1.8 U1.10 U1.12 U1.13 U1.15 U1.16 U1.21 U1.22 U1.23 U1.24 U1.26 U1.27

## Polygon pours and split planes (outlines as drawn)
GND on Top Layer "GND_L01_P015" (solid, remove dead copper, pour order 15): 17.145,1.905 15.875,0.635 1.905,0.635 0.635,1.905 0.635,53.975 1.905,55.245 31.75,55.245 32.385,54.61 32.385,27.432 25.908,20.955 24.765,20.955 17.145,13.335
Vbat on Top Layer "VBAT_L01_P010" (solid, pour order 10): 15.875,37.211 18.517,37.211 21.336,34.392 21.336,20.066 13.462,12.192 13.462,5.808 12.861,5.207 11.303,5.207 10.718,5.792 10.718,19.862 14.986,24.13 14.986,36.322
GND on Top Layer "GND_L01_P017" (solid, remove dead copper, pour order 17): 50.165,1.905 51.435,0.635 62.865,0.635 64.135,1.905 64.135,54.61 63.5,55.245 34.29,55.245 33.655,54.61 33.655,26.67 27.94,20.955 46.355,20.955 50.165,17.145
GND on Top Layer "GND_L01_P016" (solid, remove dead copper, pour order 16): 18.415,1.905 19.685,0.635 47.625,0.635 48.895,1.905 48.895,16.51 45.72,19.685 24.765,19.685 18.415,13.335
NetB6_2 on Top Layer "NETB6_2_L01_P011" (solid, pour order 11): 16.002,38.862 20.828,38.862 25.019,34.671 27.72,34.671 28.575,33.816 28.575,27.94 27.559,26.924 25.388,26.924 24.511,27.801 24.511,32.004 18.796,37.719 16.002,37.719
5V on Top Layer "5V_L01_P012" (solid, pour order 12): 28.829,36.449 29.972,37.592 29.972,44.175 27.178,46.736 25.146,46.736 21.463,42.291 16.002,42.291 16.002,41.148 20.955,41.148 25.654,36.449
NetP1_1 on Top Layer "NETP1_1_L01_P008" (solid, pour order 8): 2.667,26.289 4.953,26.289 5.715,25.527 5.715,21.971 10.414,17.272 10.414,13.716 9.779,13.081 6.731,13.081 5.969,13.843 5.969,17.399 2,21.368 2,25.622
GND on Bottom Layer "GND_L02_P009" (solid, remove dead copper, pour order 9): 50.165,1.905 51.435,0.635 62.865,0.635 64.135,1.905 64.135,54.61 63.5,55.245 34.29,55.245 33.655,54.61 33.655,26.67 27.94,20.955 46.045,20.955 50.165,16.835
GND on Bottom Layer "GND_L02_P004" (solid, remove dead copper, pour order 4): 17.145,1.905 15.875,0.635 1.905,0.635 0.635,1.905 0.635,53.975 1.905,55.245 31.75,55.245 32.385,54.61 32.385,27.432 25.908,20.955 24.765,20.955 17.145,13.335
GND on Bottom Layer "GND_L02_P006" (solid, remove dead copper, pour order 6): 18.415,1.905 19.685,0.635 47.625,0.635 48.895,1.905 48.895,16.51 45.72,19.685 24.765,19.685 18.415,13.335

## Silkscreen, mask and mechanical layers (free items; w line width, h text height)
Top Overlay:
  lines w0.254: 8.23,24.968 10.008,24.968 ; 9.119,24.079 9.119,25.857 ; 9.119,29.337 9.119,31.115 ; 17.78,0.635 17.78,13.335 24.765,20.32 45.72,20.32 49.53,16.51 49.53,0.635 ; 26.162,20.32 30.988,25.146 ; 33.02,27.305 33.02,49.784 ; 54.61,17.272 54.61,17.78 ; 59.69,16.002 59.69,16.51
Bottom Overlay:
  text "22.02.24" at 62.484,17.526 h1.52
  text "V1.2" at 62.484,15.24 h1.52
Mechanical 1:
  the board outline again, w0.254

## Text inside footprints (layer, text, board x,y; h text height)
P3: Bottom Overlay "1" at 6.35,49.657 h1; Bottom Overlay "39" at 57.912,48.514 h1
U1: Bottom Overlay "*" at 42.136,41.631 h1.27 r180; Mechanical 13 "*" at 42.136,42.799 h1.27 r180